# Altium PCB nrf-adafruit bno055.PcbDoc
Units mm, origin at the board's own origin, x right, y up, seen from the top; angles counter-clockwise.
Board outline 49.99 x 33.68 mm, 2 copper layers (Top Layer, Bottom Layer); 52 components, 41 nets, 215 pads, 48 vias.
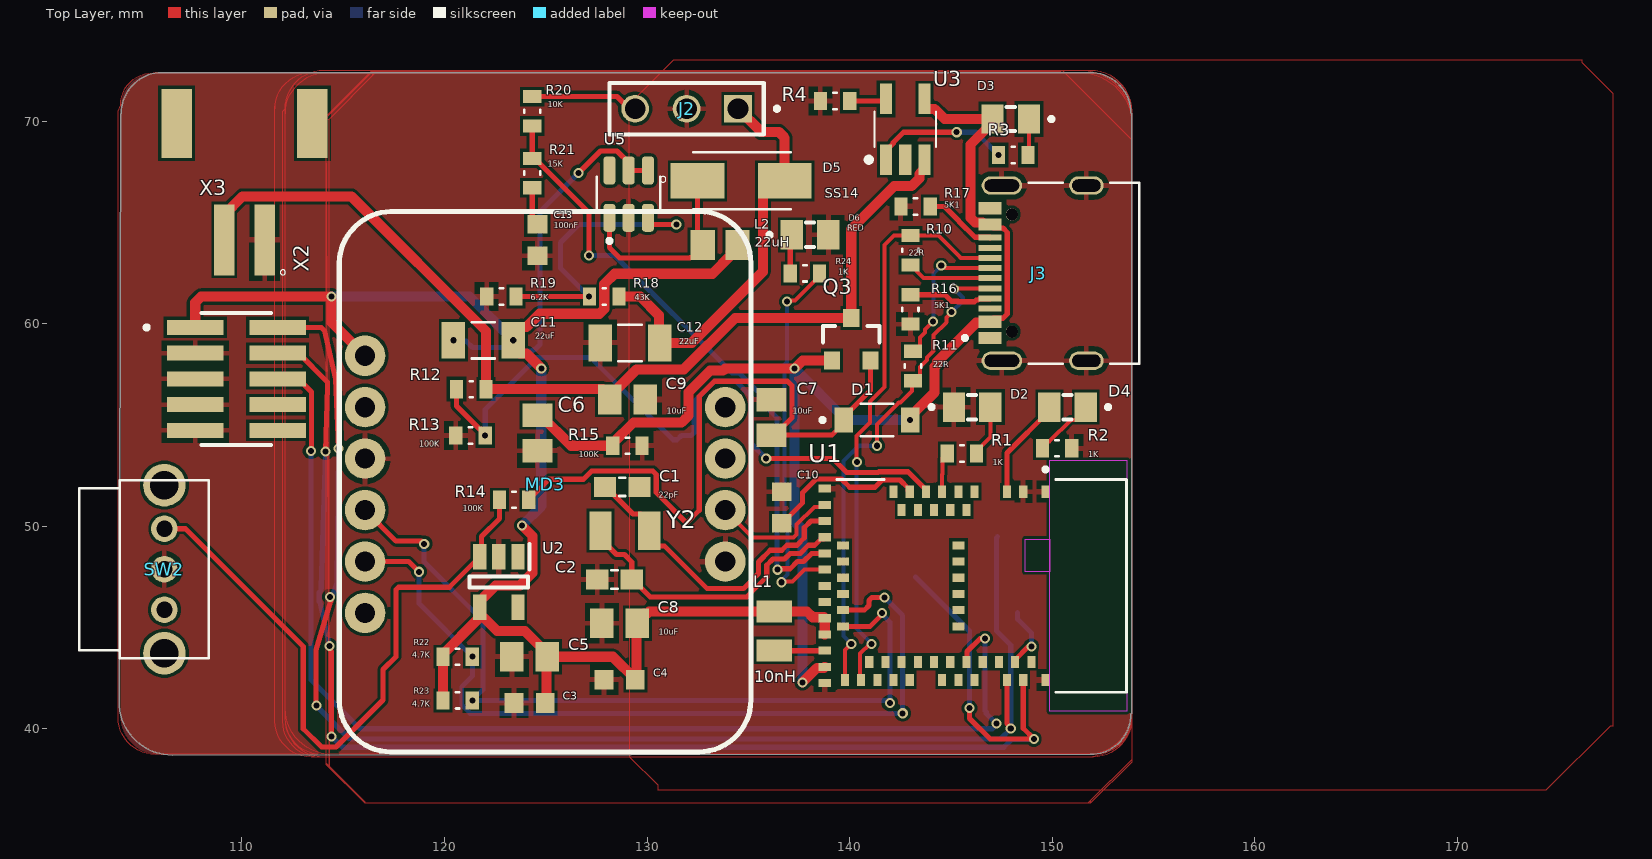
[diagram p0: Top Layer view]
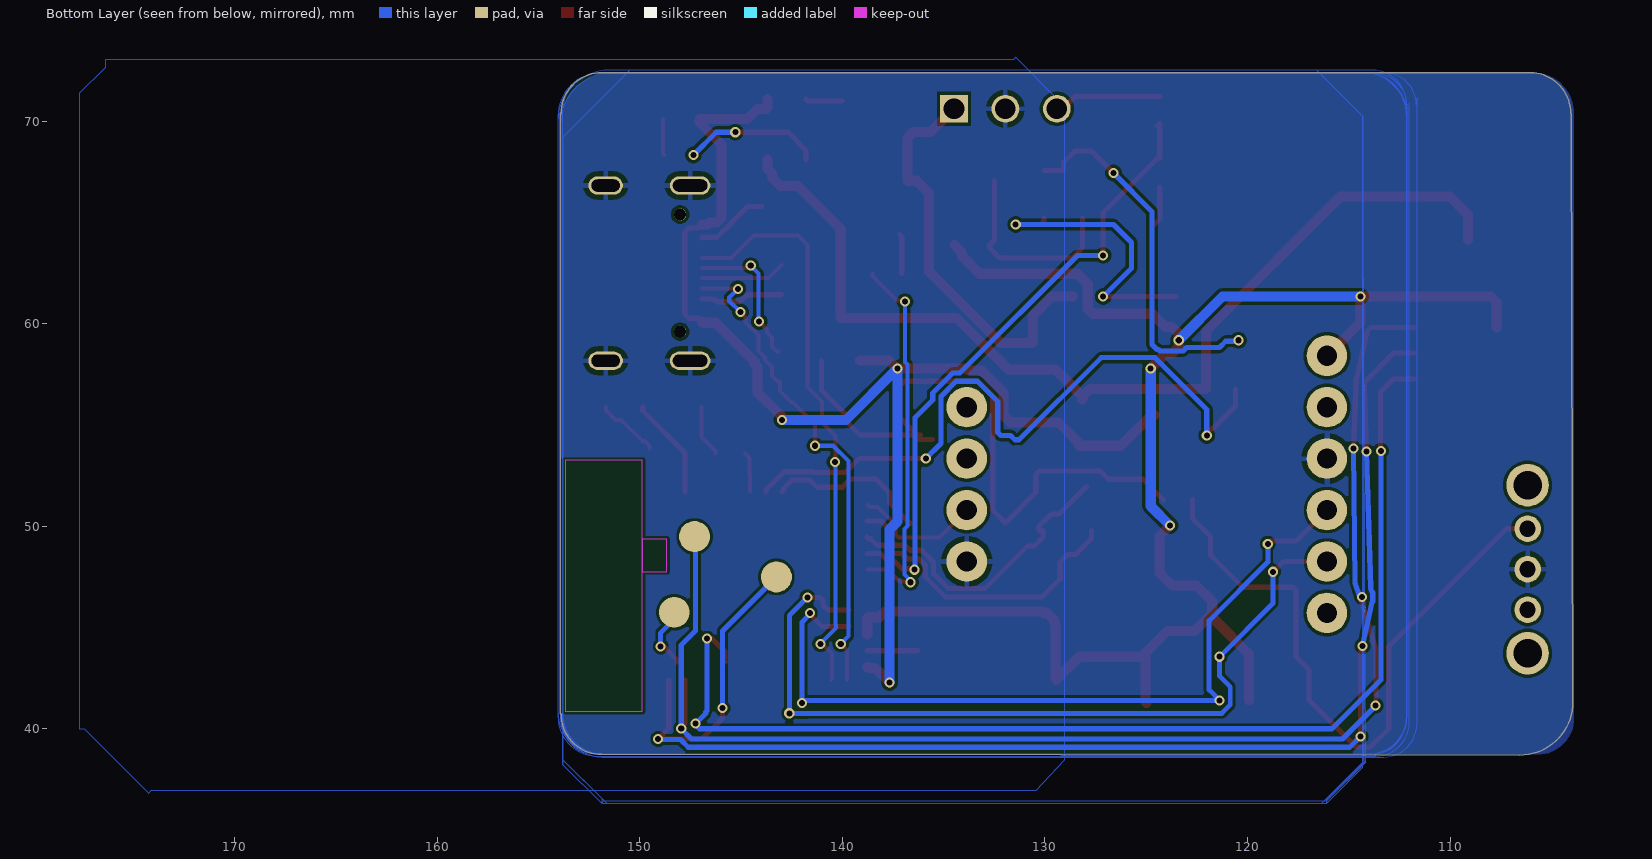
[diagram p1: Bottom Layer view, seen from below]
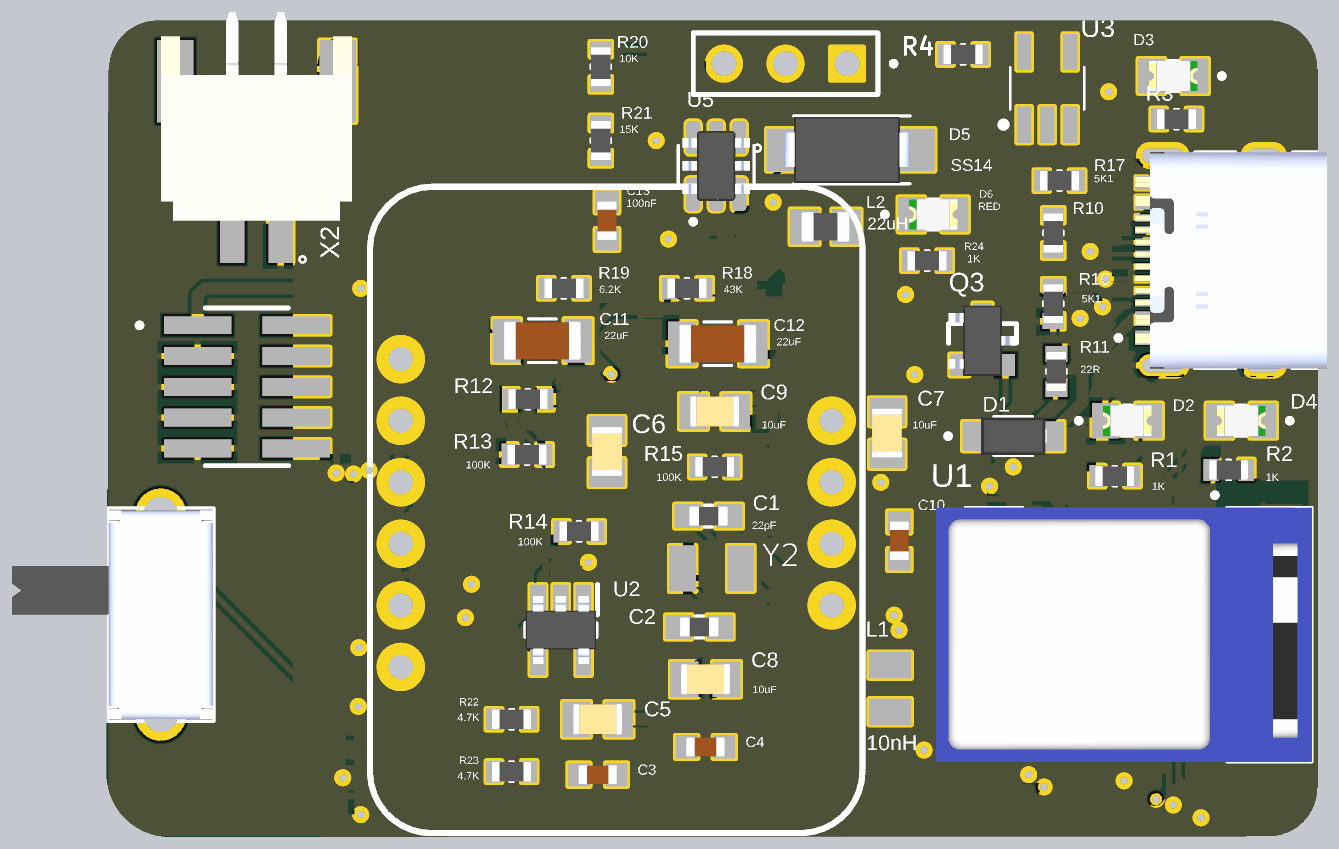
[diagram p2: 3D render of the assembled board from above, using the file's embedded part models]

## Layer stack, top to bottom
Top Solder: solder mask 0.0102, Solder Resist, Dk 3.5
Top Layer: signal copper 0.0356
Dielectric 1: dielectric 0.32, FR-4, Dk 4.8
Bottom Layer: signal copper 0.0356
Bottom Solder: solder mask 0.0102, Solder Resist, Dk 3.5

## Board outline
103.936,41.323 104.013,70.358 104.045,70.39 cw(c106.045,70.39) 106.045,72.39 151.892,72.39 cw(c151.892,70.39) 153.892,70.39 153.924,70.39 153.924,40.735 153.892,40.735 cw(c151.892,40.735) 151.892,38.735 106.552,38.707 cw(c106.552,41.323)

## Design rules (kind name [scope] priority, off if disabled: settings)
Clearance Clearance_1 [All] p1: gap=0.15 ignorepadtopadclearanceinfootprint=FALSE
PolygonConnect [All] p1: connectstyle=Relief reliefconductorwidth=0.254 reliefentries=4 polygonreliefangle="90 Angle" airgapwidth=0.254
RoutingVias [All] p1: holewidth=0.711 width=1.27 viastyle="Through Hole" minholewidth=0.711 minwidth=1.27 maxholewidth=0.711 maxwidth=1.27
SolderMaskExpansion [All] p1: expansion=0.102 istentingtop=FALSE
Width [All] p1: maxlimit=0.5 minlimit=0.2 preferedwidth=0.254 minimp=50.000000 maximp=50.000000 favimp=50.000000
30 further rules are at their usual default settings.

## Components (designator, comment, footprint, x,y, rotation, side; value= is the part's Value field where it differs from the comment)
C1 "22pF" CAPC1608X90 128.778,51.943 r0 top
C2 "22pF" CAPC1608X90 128.397,47.371 r180 top
C3 "0.1uF" CAPC1608X90N#1 124.206,41.275 r180 top
C4 "0.1uF" CAPC1608X90N#1 128.651,42.418 r180 top
C5 "10uF" CAPC2012X88N 124.206,43.561 r0 top
C6 "10uF" CAPC2012X88N 124.587,54.61 r90 top
C7 "10uF" CAPC2012X88N 136.144,55.372 r270 top
C8 "10uF" CAPC2012X88N 128.651,45.212 r0 top
C9 "10uF" CAPC2012X88N 129.032,56.261 r180 top
C10 "0.1uF" CAPC1608X90N#1 136.652,50.927 r90 top
C11 "22uF" CAPC3216X229N 121.92,59.182 r0 top
C12 "22uF" CAPC3216X229N 129.159,59.055 r0 top
C13 "100nF" CAPC1608X90N#2 124.587,64.135 r90 top
D1 "MBR0540" DIO_MBR0540-TP 141.351,55.245 r0 top
D2 "RED" LEDC2012X70N 146.05,55.88 r0 top
D3 "ORANGE" LEDC2012X70N 147.955,70.104 r180 top
D4 "BLUE" LEDC2012X70N 150.76,55.88 r180 top
D5 "SS14" SMA 134.493,67.056 r0 top
D6 "RED" LEDC2012X70N 138.049,64.389 r0 top
J2 "MTSW-103-13-G-S-570" SAMTEC_MTSW-103-13-G-S-570 131.953,70.612 r0 top
J3 "TYPE-C-31-M-12" HRO_TYPE-C-31-M-12 151.689,62.496 r90 top
L1 "10nH" INDC2015X152N 136.271,44.831 r270 top
L2 "22uH" INDC2012X145N 133.604,63.881 r180 top
MD3 "Module BNO055" PCBComponent_1 124.968,52.832 r270 top
Q3 "AO3401" SOT23-3 140.081,59.182 r0 top
R1 "1K" RES_ERJU03J5R6V 145.542,53.594 r0 top
R2 "1K" RES_ERJU03J5R6V 150.241,53.848 r0 top
R3 "1K" RES_ERJU03J5R6V 148.082,68.326 r180 top
R4 "4K7" RES_ERJU03J5R6V 139.282,70.993 r180 top
R10 "22R" RES_ERJU03J5R6V 143.002,63.627 r270 top
R11 "22R" RES_ERJU03J5R6V 143.129,57.912 r90 top
R12 "100K" RES_ERJU03J5R6V 121.322,56.769 r180 top
R13 "100K" RES_ERJU03J5R6V 121.285,54.483 r0 top
R14 "100K" RES_ERJU03J5R6V 123.436,51.312 r0 top
R15 "100K" RES_ERJU03J5R6V 129.032,53.975 r0 top
R16 "5K1" RES_ERJU03J5R6V 143.002,60.706 r90 top
R17 "5K1" RES_ERJU03J5R6V 143.256,65.786 r180 top
R18 "43K" RES_ERJU03J5R6V 127.889,61.341 r0 top
R19 "6.2K" RES_ERJU03J5R6V 122.809,61.341 r0 top
R20 "10K" RES_ERJU03J5R6V 124.333,70.485 r270 top
R21 "15K" RES_ERJU03J5R6V 124.333,67.437 r90 top
R22 "4.7K" RES_ERJU03J5R6V 120.65,43.561 r0 top
R23 "4.7K" RES_ERJU03J5R6V 120.65,41.402 r0 top
R24 "1K" RES_ERJU03J5R6V 137.795,62.484 r0 top
SW2 "SK12D07VG4" SK12D07VG4 106.172,47.879 r270 top
U1 "MDBT50Q-1MV2" XCVR_MDBT50Q-1MV2 145.921,47.057 r270 top
U2 "RT9080-33GJ5" SOT94P280X100-5N 122.682,47.244 r270 top
U3 "MCP73831T-2ACI/OT" SOT23-5 142.748,69.596 r90 top
U5 "MT3608" SOT95P280X145-6N 129.093,66.394 r90 top
X2 "FTSH-105-01-X-DV-P-K-X" SAMTEC_FTSH-105-01-X-DV-P-K-X 109.728,57.277 r270 top
X3 "S2B-PH-SM4-TB" JST_S2B-PH-SM4-TB 110.125,64.135 r0 top
Y2 "32.768 KHz" XTAL3215 128.905,49.784 r0 top

## Footprints (in the part's own frame and the unit in brackets; to place one, negate y for a bottom-side part, rotate by r counter-clockwise, add the part's x,y. Pads: shape width x height; smd on the part's side, far side on the other; paste and mask are expansions set on the pad)
CAPC1608X90 [mm]
  rect 1.1x1 smd: 1(-0.85,0) 2(0.85,0)
  silkscreen extent -0.15,-0.45 0.15,0.45, body extent -0.8,-0.4 0.8,0.4, height 0.9
CAPC1608X90N#1 [mm]
  rect 0.92x0.97 smd: 1(-0.775,0) 2(0.775,0)
  body extent -0.8,-0.4 0.8,0.4, height 0.95
CAPC1608X90N#2 [mm]
  rect 0.92x0.98 smd: 1(-0.775,0) 2(0.775,0)
  body extent -0.8,-0.41 0.8,0.41, height 0.9
CAPC2012X88N [mm]
  rect 1.16x1.47 smd: 1(-0.875,0) 2(0.875,0)
  body extent -1.02,-0.64 1.02,0.64, height 1.4
CAPC3216X229N [mm]
  rect 1.16x1.82 smd: 1(-1.475,0) 2(1.475,0)
  silkscreen extent -0.57,-0.9 0.57,0.9, body extent -1.6,-0.8 1.6,0.8, height 2.29
DIO_MBR0540-TP [mm]
  rect 0.91x1.22 smd: A(1.635,0) C(-1.635,0)
  silkscreen extent -2.79,-0.8 0.8,0.8, body extent -1.83,-0.77 1.83,0.77, height 0.8
HRO_TYPE-C-31-M-12 [mm]
  rect 0.6x1.14 smd mask+0.05: A1_B12(-3.2,4.75) A4_B9(-2.4,4.75) B1_A12(3.2,4.75) B4_A9(2.4,4.75)
  rect 0.3x1.14 smd mask+0.05: A5(-1.25,4.75) A6(-0.25,4.75) A7(0.25,4.75) A8(1.25,4.75) B5(1.75,4.75) B6(0.75,4.75) B7(-0.75,4.75) B8(-1.75,4.75)
  oval 0.9x2 hole 0.6 slot 1.7 at 90 deg: S1(-4.325,4.17) S2(4.325,4.17)
  oval 0.9x1.7 hole 0.6 slot 1.4 at 90 deg: S3(-4.325,0) S4(4.325,0)
  round 0.6 hole 0.6 unplated: ""(-2.89,3.68) ""(2.89,3.68)
  silkscreen extent -4.47,-2.6 4.47,6.1, body extent -4.47,-2.6 4.47,5.31, height 3.31
INDC2012X145N [mm]
  rect 1.2x1.47 smd: 1(-0.86,0) 2(0.86,0)
  body extent -1,-0.63 1,0.63, height 1.45
INDC2015X152N [mm]
  rect 1.09x1.75 smd: 1(-0.959,0) 2(0.959,0)
JST_S2B-PH-SM4-TB [mm]
  rect 1x3.5 smd: 1(1,0) 2(-1,0)
  rect 1.5x3.4 smd: P1(3.35,5.75) P2(-3.35,5.75)
  silkscreen extent 1.77,-1.73 2.03,-1.47, body extent -3.95,0 3.95,8.6, height 5.5
LEDC2012X70N [mm]
  rect 1.1x1.45 smd: A(0.9,0) C(-0.9,0)
  silkscreen extent -2.1,-0.6 0.2,0.6, body extent -1,-0.63 1,0.63, height 0.7
PCBComponent_1 [mm]
  round 2 hole 1 mask+0: 1(-5.588,-8.89) 2(-3.048,-8.89) 3(-0.508,-8.89) 4(2.032,-8.89) 5(4.572,-8.89) 6(7.112,-8.89) 7(-3.048,8.89) 8(-0.508,8.89) 9(2.032,8.89) 10(4.572,8.89)
  silkscreen extent -12.71,-10.16 13.97,10.16
RES_ERJU03J5R6V [mm]
  rect 0.65x0.9 smd paste+0 mask+0.102: 1(-0.725,0) 2(0.725,0)
  silkscreen extent -0.08,-0.4 0.08,0.4, body extent -0.8,-0.4 0.8,0.4, height 0.45
SAMTEC_FTSH-105-01-X-DV-P-K-X [mil]
  rect 29x110 smd paste+0 mask+4.02: 01(-100,-80) 02(-100,80) 03(-50,-80) 04(-50,80) 05(0,-80) 06(0,80) 07(50,-80) 08(50,80) 09(100,-80) 10(100,80)
  silkscreen extent -128,-178 128,68
SAMTEC_MTSW-103-13-G-S-570 [mm]
  rect 1.37x1.37 / inner round 1.37 / far side rect 1.37x1.37 hole 1.02 mask+0.102: 01(2.54,0)
  round 1.37 hole 1.02 mask+0.102: 02(0,0) 03(-2.54,0)
  silkscreen extent -3.81,-1.27 4.56,1.27
SK12D07VG4 [mm]
  round 1.308 hole 0.8: 1(-2,0) 2(2,0) COM(0,0)
  round 2.1 hole 1.4: M1(-4.15,0) M2(4.15,0)
  silkscreen extent -4.4,-4.2 4.4,2.2, body extent -4.3,-6.15 4.3,2.15, height 4.7
SMA [mm]
  rect 2.65x1.75 smd paste+0 mask+0.102: P1(-2,0) P2(2.3,0)
  silkscreen extent -3.84,-1.4 2.6,1.4, body extent -2.6,-1.36 2.6,1.36, height 2.5
SOT23-3 [mm]
  rect 0.8x0.9 smd: 1(-0.95,-1) 2(0.95,-1) 3(0,1.1)
  silkscreen extent -1.4,-0.1 1.4,0.7, body extent -1.4,-1.45 1.4,1.45, height 1.25
SOT23-5 [mm] "SOT23, 5-Leads, Body 3.0x3.0mm (max), Pitch 0.95mm, IPC Medium Density"
  rect 1.5x0.6 smd: 1(-1.5,0.95) 2(-1.5,0) 3(-1.5,-0.95) 4(1.5,-0.95) 5(1.5,0.95)
  silkscreen extent -1.62,-1.53 0.87,1.92, body extent -1.75,-1.52 1.75,1.53, height 1.45
SOT94P280X100-5N [mm]
  rect 1.25x0.65 smd paste+0 mask+0.102: 1(-1.25,0.94) 2(-1.25,0) 3(-1.25,-0.94) 4(1.25,-0.94) 5(1.25,0.94)
  silkscreen extent -1.87,-1.45 0.27,1.51, body extent -1.4,-1.45 1.4,1.45, height 1
SOT95P280X145-6N [mm]
  rrect50% 1.37x0.59 smd: 1(-1.17,0.95) 2(-1.17,0) 3(-1.17,-0.95) 4(1.17,-0.95) 5(1.17,0) 6(1.17,0.95)
  silkscreen extent -2.4,-1.57 0.85,1.56, body extent -1.45,-1.4 1.45,1.4, height 1.45
XCVR_MDBT50Q-1MV2 [mm]
  rect 0.6x0.4 smd: 1(-4.65,3.75) 2(-4.65,2.65) 3(-4.65,1.85) 4(-4.65,0.25) 5(-3.75,-0.15) 6(-4.65,-0.55) 7(-3.75,-0.95) 8(-4.65,-1.35) 9(-3.75,-1.75) 10(-4.65,-2.15) 11(-3.75,-2.55) 12(-4.65,-2.95) 13(-3.75,-3.35) 14(-4.65,-3.75) 34(4.65,-6.15) 35(4.65,-5.35) 36(3.75,-4.95) 37(4.65,-4.55) 38(3.75,-4.15) 39(4.65,-3.75) 40(3.75,-3.35) 41(4.65,-2.95) 42(3.75,-2.55) 43(3.75,-1.75) 44(4.65,-1.35) 45(3.75,-0.95) 46(4.65,-0.55) 47(3.75,-0.15) 48(4.65,0.25) 49(3.75,0.65) 50(3.75,1.45) 51(4.65,1.85) 52(3.75,2.25) 53(4.65,2.65) 54(3.75,3.05) 55(4.65,3.75)
  rect 0.4x0.6 smd: 15(-4.8,-7.15) 16(-4,-7.15) 17(-3.2,-7.15) 18(-2.4,-7.15) 19(-2,-6.25) 20(-1.6,-7.15) 21(-1.2,-6.25) 22(-0.8,-7.15) 23(-0.4,-6.25) 24(0,-7.15) 25(0.4,-6.25) 26(0.8,-7.15) 27(1.2,-6.25) 28(1.6,-7.15) 29(2,-6.25) 30(2.4,-7.15) 31(3.2,-7.15) 32(4,-7.15) 33(4.8,-7.15) 56(-2,-0.55) 57(-1.2,-0.55) 58(-0.4,-0.55) 59(0.4,-0.55) 60(1.2,-0.55) 61(2,-0.55)
  Keep-Out Layer region: -0.7,2.75 -2.3,2.75 -2.3,3.95 -0.7,3.95
  Keep-Out Layer region: 6.2,3.95 -6.2,3.95 -6.2,7.75 6.2,7.75
  Keep-Out Layer region: -0.7,2.75 -2.3,2.75 -2.3,3.95 -0.7,3.95
  Keep-Out Layer region: 6.2,3.95 -6.2,3.95 -6.2,7.75 6.2,7.75
  silkscreen extent -5.85,-6.55 5.25,7.75, body extent -5.25,-7.75 5.25,7.75, height 1.69
XTAL3215 [mm] "XTAL3215"
  rect 1.1x1.9 smd: P$1(1.2,0) P$2(-1.2,0)

## Part data
C1 C2: library part CC0603JPNPO9BN220, "22 pF Â±5% 50V Ceramic Capacitor C0G, NP0 0603 (1608 Metric)", Package="0603 Yageo", Check_prices=https://www.snapeda.com/parts/CC0603JPNPO9BN220/Yageo/view-part/?ref=eda, MF=Yageo, MP=CC0603JPNPO9BN220, SnapEDA_Link=https://www.snapeda.com/parts/CC0603JPNPO9BN220/Yageo/view-part/?ref=snap
C3 C4 C10: library part C0603C104K4RAC, "0.1 ÂµF Â±10% 16V Ceramic Capacitor X7R 0603 (1608 Metric)", Package="603-2 KEMET", Check_prices=https://www.snapeda.com/parts/C0603C104K4RAC/KEMET/view-part/?ref=eda, MF=KEMET, MP=C0603C104K4RAC, SnapEDA_Link=https://www.snapeda.com/parts/C0603C104K4RAC/KEMET/view-part/?ref=snap
C5 C6 C7 C8 C9: library part C0805C106K4PACTU, "10 ÂµF Â±10% 16V Ceramic Capacitor X5R 0805 (2012 Metric)", Package="0805 Kemet", Check_prices=https://www.snapeda.com/parts/C0805C106K4PACTU/KEMET/view-part/?ref=eda, MF=KEMET, MP=C0805C106K4PACTU, SnapEDA_Link=https://www.snapeda.com/parts/C0805C106K4PACTU/KEMET/view-part/?ref=snap
C11 C12: library part 12063D226MAT2A, "22 µF ±20% 25V Ceramic Capacitor X5R 1206 (3216 Metric)", Package=None, Check_prices=https://www.snapeda.com/parts/12063D226MAT2A/Kyocera/view-part/?ref=eda, MF=Kyocera, MP=12063D226MAT2A, SnapEDA_Link=https://www.snapeda.com/parts/12063D226MAT2A/Kyocera/view-part/?ref=snap
C13: library part 06035C104K4T2A, "Capacitor MLCC 0603 100nF 50V", Package="1608 AVX", Check_prices=https://www.snapeda.com/parts/06035C104K4T2A/AVX/view-part/?ref=eda, MF=AVX, MP=06035C104K4T2A, SnapEDA_Link=https://www.snapeda.com/parts/06035C104K4T2A/AVX/view-part/?ref=snap
D1: library part MBR0540-TP, "Diode Schottky 40 V 500mA Surface Mount SOD-123", Package="SOD-123 Multicomp", Check_prices=https://www.snapeda.com/parts/MBR0540-TP/Micro+Commercial+Components/view-part/?ref=eda, MF="Micro Commercial", MP=MBR0540-TP, SnapEDA_Link=https://www.snapeda.com/parts/MBR0540-TP/Micro+Commercial+Components/view-part/?ref=snap
D2 D3 D4 D6: library part 597-3305-607F, "LED Uni-Color Green 4-Pin Chip 0805 T/R", Package=None, Availability=Unavailable, MP=597-3305-607F, Price=None
D5: "Diode Schottky 40 V 1A Surface Mount DO-214AC (SMA)", Package="SMA-2 ON Semiconductor", Check_prices=https://www.snapeda.com/parts/SS14/Onsemi/view-part/?ref=eda, MF=ON, MP=SS14, SnapEDA_Link=https://www.snapeda.com/parts/SS14/Onsemi/view-part/?ref=snap
J2: "Connector Header Through Hole 3 position 0.100 (2.54mm)", Package=None, Check_prices=https://www.snapeda.com/parts/MTSW-103-13-G-S-570/Samtec/view-part/?ref=eda, MF=Samtec, MP=MTSW-103-13-G-S-570, SnapEDA_Link=https://www.snapeda.com/parts/MTSW-103-13-G-S-570/Samtec/view-part/?ref=snap
J3: "USB Connectors 24 Receptacle 1 8.94*7.3mm RoHS", Package=Package, Check_prices=https://www.snapeda.com/parts/TYPE-C-31-M-12/HRO+Electronics+Co.%252C+Ltd./view-part/?ref=eda, MF="HRO Electronics Co., Ltd.", MP=TYPE-C-31-M-12, SnapEDA_Link=https://www.snapeda.com/parts/TYPE-C-31-M-12/HRO+Electronics+Co.%252C+Ltd./view-part/?ref=snap
L1: library part LQW2BAS10NG00L, "FIXED IND 10NH 600MA 100 MOHM", Package=None, Availability=Unavailable, MP=LQW2BAS10NG00L, Price=None
L2: library part LQM21DH220M70L, "Inductor with Inductance: 22uH Tol. +/-20%, Package: 0805 (2012)", Package="2012 Bourns", Check_prices=https://www.snapeda.com/parts/LQM21DH220M70L/Murata/view-part/?ref=eda, MF=Murata, MP=LQM21DH220M70L, SnapEDA_Link=https://www.snapeda.com/parts/LQM21DH220M70L/Murata/view-part/?ref=snap
MD3: library part Component_1, "Module 9 DOF BNO055 by Adafruit"
Q3: "P-Channel 30 V 4A (Ta) 1.4W (Ta) Surface Mount SOT-23-3", Package="SOT-23-3 Alpha &amp; Omega Semiconductor", Check_prices=https://www.snapeda.com/parts/AO3401/Alpha/view-part/?ref=eda, MF="Alpha & Omega Semiconductor", MP=AO3401, SnapEDA_Link=https://www.snapeda.com/parts/AO3401/Alpha/view-part/?ref=snap
R1 R2 R3 R4 R10 R11 R12 R13 R14 R15 R16 R17 R18 R19 R20 R21 R22 R23 R24: library part ERJU03J5R6V, "0201 anti-sulfurated resistor 0603 Anti-Sulfurated", Package="1608-2 Panasonic", Check_prices=https://www.snapeda.com/parts/ERJ-U03J5R6V/Panasonic/view-part/?ref=eda, MF=Panasonic, MP=ERJ-U03J5R6V, SnapEDA_Link=https://www.snapeda.com/parts/ERJ-U03J5R6V/Panasonic/view-part/?ref=snap
SW2: "Switch Slide ON ON SPDT Side Slide 0.3A 30VDC PC Pins Bracket Mount/Through Hole Bulk", Package=None, Check_prices=https://www.snapeda.com/parts/SK12D07VG4/C%2526K/view-part/?ref=eda, MF=C&K, MP=SK12D07VG4, SnapEDA_Link=https://www.snapeda.com/parts/SK12D07VG4/C%2526K/view-part/?ref=snap
U1: "802.15.4, Bluetooth Bluetooth v5.4, ZigbeeÂ® Transceiver Module 2.36GHz ~ 2.5GHz Integrated, Chip Surface Mount", Package="SMD-61 Raytac Corporation", Check_prices=https://www.snapeda.com/parts/MDBT50Q-1MV2/Raytac+Corporation/view-part/?ref=eda, MF="Raytac Corporation", MP=MDBT50Q-1MV2, SnapEDA_Link=https://www.snapeda.com/parts/MDBT50Q-1MV2/Raytac+Corporation/view-part/?ref=snap
U2: "Linear Voltage Regulator IC Positive Fixed 1 Output 600mA TSOT-23-5", Package="TSOT-23 Richtek", Check_prices=https://www.snapeda.com/parts/RT9080-33GJ5/Richtek/view-part/?ref=eda, MF="Richtek USA", MP=RT9080-33GJ5, SnapEDA_Link=https://www.snapeda.com/parts/RT9080-33GJ5/Richtek/view-part/?ref=snap
U3: library part MCP73831/2, "MCP73831/2 LIPO Charger    VDD: 3.75 - 6V  Temp -40 - 85Â°C  Programmable Charge Rate: 15-500mA       NOTE: STAT is a tri-state logic output on the MCP73831 and an open-drain output on the MCP73832.   SOT23-5 with 4.2V output and tri-state logic on STAT = MCP73831T-2ACI/OT", JLC_ROTATION=0, LCSC=C424093, Temp=Temp:, 3.75-6V=3.75-6V, -40-85Â°C=-40-85Â°C, DeviceSetName=MCP73831/2, GateName_1=G$1, LibraryName=microbuilder, LIPOCharger="LIPO Charger", MCP73831/2=MCP73831/2, SymbolName_1=MCP73831/2, VDD=VDD:
U5: "High Efficiency 1.2MHz2A Step Up Converter", Package=Package, Availability="Not in stock", Check_prices=https://www.snapeda.com/parts/MT3608/Aerosemi+Technology+Co.%252C+Ltd/view-part/?ref=eda, MF="Aerosemi Technology Co., Ltd", MP=MT3608, Price=None, SnapEDA_Link=https://www.snapeda.com/parts/MT3608/Aerosemi+Technology+Co.%252C+Ltd/view-part/?ref=snap
X2: Package=None, Availability=Unavailable, MF="{'manufacturer': u'Samtec Inc.'}", MP=FTSH-105-01-X-DV-P-K-X, Price=None
X3: "Connector Header Surface Mount, Right Angle 2 position 0.079 (2.00mm)", Package=None, Check_prices=https://www.snapeda.com/parts/S2B-PH-SM4-TB/JST/view-part/?ref=eda, MF="JST Sales", MP=S2B-PH-SM4-TB, SnapEDA_Link=https://www.snapeda.com/parts/S2B-PH-SM4-TB/JST/view-part/?ref=snap
Y2: library part XTAL-3.2X1.5, "Low cost SMT crystals, no capacitors included    http://www.ladyada.net/library/eagle", DeviceName=-3.2X1.5, DeviceSetName=XTAL, GateName_1=G$1, LibraryName=adafruit2, SymbolName_1=XTAL

## Free pads (board coordinates)
  round 1.524 smd far side: "TP NCF1"(148.298,45.755) "TP SWCLK"(143.256,47.498) "TP SWDIO"(147.3,49.492)

## Via types
v1: diameter 0.5, hole 0.3, Top Layer to Bottom Layer, 48 vias

## Nets (pads, with @x,y where several pads share a name; then routed paths per layer and width w, separated by ;. In a path a pad name is that pad's centre, name@x,y a point inside that pad or via, vN(x,y) a via of type N, cw(c..) or ccw(c..) an arc to the next point about the centre after c; other vN are vias at no path point)
3.3V: C3.1 C4.1 C5.2 C8.2 C11.2 L1.1 L2.1 MD3.1 R22.1 R23.1 U1.28 U1.30 U2.4 X2.01 | length 81.8
  Top Layer w0.5: X2.01 107.696,61.048 107.989,61.341 v1(114.427,61.341) 114.427,60.071 MD3.1 ; R23.1 R22.1 119.925,43.686 U2.4@121.667,45.428 ; v1(123.825,50.038) 124.347,49.516 124.347,47.703 123.72,47.076 122.524,47.076 121.742,46.294 U2.4 121.742,45.694 122.604,44.833 123.964,44.833 125.081,43.716 C5.2 ; v1(124.781,57.796) 124.055,58.522 123.725,58.522 123.395,58.852 123.395,59.512 123.725,59.842 124.055,59.842 124.704,60.491 127.655,60.491 127.889,60.725 127.889,61.957 128.401,62.469 133.232,62.469 134.114,63.35 134.114,63.531 L2.1 ; C3.1 125.031,41.325 125.031,43.511 C5.2 ; U1.30 U1.28 138.721,45.507 138.179,45.507 137.896,45.79 L1.1 130.104,45.79 130.011,45.697 129.856,45.697 129.526,45.367 C8.2 129.476,45.162 129.476,42.468 C4.1 129.426,42.443 128.308,43.561 C5.2
  Bottom Layer w0.5: v1(114.427,61.341) 121.236,61.341 v1(123.395,59.182) ; v1(123.825,50.038) 124.781,50.994 v1(124.781,57.796)
5V: C12.2 D5.P2 J2.01 R18.2 | length 20.5
  Top Layer w0.5: R18.2 129.667,61.341 130.586,60.422 130.586,59.103 C12.2 132.207,59.055 135.718,62.566 135.718,66.431 136.343,67.056 D5.P2 136.793,69.176 136.5,69.469 135.636,69.469 J2.01
AREF: C10.1 U1.12 | length 8.1
  Top Layer w0.254: C10.1 136.677,50.152 137.683,51.158 137.683,51.661 138.356,52.334 139.599,52.334 140.009,51.924 141.252,51.924 141.612,52.284 142.494,52.284 142.898,51.88 142.898,51.78 U1.12
D10: MD3.9 U1.16 | length 6.4
  Top Layer w0.2: MD3.9 135.216,49.442 137.241,49.442 137.387,49.588 137.387,50.083 138.261,50.957 138.671,50.957 U1.16
EN: R14.1 SW2.1 U2.3 | length 32.3
  Top Layer w0.254: SW2.1 107.22,49.879 113.03,44.069 113.03,40.005 113.938,39.097 114.645,39.097 116.967,41.419 116.967,42.926 117.602,43.561 117.602,46.863 117.729,46.99 120.238,46.99 U2.3 121.835,48.587 121.835,49.5 122.711,50.376 R14.1
GND: C1.2 C2.2 C3.2 C4.2 C5.1 C6.1 C7.1 C8.1 C9.1 C10.2 C12.1 C13.1 D2.C D6.A J2.02 J3.A1_B12 J3.B1_A12 J3.S1 J3.S2 J3.S3 J3.S4 MD3.3 MD3.10 R2.2 R4.2 R13.1 R15.2 R16.1 R17.2 R19.1 SW2.COM U1.1 U1.2 U1.15 U1.33 U1.55 U2.2 U3.2 U5.2 X2.03 X2.05 X2.07 X2.09 X3.1
"Led 1": R1.1 U1.8 | length 2
  Top Layer w0.2: U1.8 144.571,52.565 144.592,52.586 144.592,53.369 R1.1
"Led 2": D4.A U1.3 | length 5
  Top Layer w0.254: U1.3 147.771,53.616 149.86,55.705 D4.A
NetC1_1: C1.1 U1.17 Y2.P$1 | length 15.6
  Top Layer w0.254: C1.1 127.978,51.943 129.314,50.607 129.682,50.607 130.302,49.987 130.302,49.784 Y2.P$1 130.105,49.442 130.528,49.019 130.87,49.019 132.969,46.92 134.757,46.92 135.507,47.67 135.507,48.241 136.079,48.814 136.651,48.814 136.902,49.065 137.397,49.065 137.764,49.432 137.764,49.927 138.094,50.257 U1.17
NetC2_1: C2.1 U1.18 Y2.P$2 | length 14.7
  Top Layer w0.254: Y2.P$2 127.705,49.384 128.488,48.602 128.888,48.602 129.247,48.242 C2.1 129.297,47.371 130.152,46.516 134.924,46.516 135.911,47.502 135.911,48.074 136.219,48.382 136.791,48.382 137.069,48.661 137.564,48.661 137.964,49.061 138.275,49.061 138.598,49.384 138.698,49.384 U1.18
NetC7_2: C7.2 D1.C Q3.2 R14.2 | length 32.4
  Top Layer w0.254: R14.2 125.173,52.324 126.867,52.324 127.263,52.72 130.293,52.72 130.455,52.558 130.455,51.663 131.953,50.165 132.581,50.793 132.581,56.409 133.329,57.157 136.941,57.157 137.156,56.942 137.156,55.354 136.299,54.497 C7.2 ; C7.2@135.558,54.278 136.306,54.278 136.335,54.307 C7.2@136.525,54.497 ; C7.2@136.624,54.497 139.123,54.497 139.716,55.09 D1.C 139.716,55.4 141.031,56.715 Q3.2
NetC11_1: C11.1 U5.4 U5.5 | length 18.4
  Top Layer w0.254: v1(126.619,67.437) 127.708,68.526 128.521,68.526 129.093,67.954 U5.5 U5.4
  Bottom Layer w0.254: v1(120.445,59.182) 120.49,59.137 121.076,59.137 121.39,58.823 123.009,58.823 123.177,58.655 124.323,58.655 124.395,58.727 124.47,58.727 124.714,58.972 124.714,65.532 v1(126.619,67.437)
NetC13_2: C13.2 R21.1 | length 1.9
  Top Layer w0.254: R21.1 124.333,65.164 C13.2
NetD2_A: D2.A R1.2 | length 2.6
  Top Layer w0.2: R1.2 146.267,53.719 146.95,54.402 D2.A
NetD3_C: D3.C R3.1 | length 1.8
  Top Layer w0.2: R3.1 148.855,68.374 D3.C
NetD4_C: D4.C R2.1 | length 3.2
  Top Layer w0.2: R2.1 149.516,53.973 149.741,54.198 149.866,54.198 150.923,55.255 151.21,55.255 151.66,55.705 D4.C
NetD5_P1: D5.P1 L2.2 U5.1 | length 9.9
  Top Layer w0.254: U5.1 128.143,63.754 128.651,63.246 132.109,63.246 132.136,63.273 132.271,63.273 132.744,63.746 L2.2 132.493,64.132 D5.P1
NetD6_C: D6.C R24.1 | length 1.9
  Top Layer w0.254: R24.1 137.07,64.31 D6.C
NetJ2_03: J2.03 R20.1 | length 5.3
  Top Layer w0.254: R20.1 128.513,71.21 129.111,70.612 J2.03
NetJ3_A5: J3.A5 R16.2 | length 4.1
  Top Layer w0.254: R16.2 144.707,61.431 145.032,61.106 145.337,61.106 145.356,61.087 146.168,61.087 146.254,61.173 146.347,61.173 146.397,61.223 146.916,61.223 J3.A5
NetJ3_A6: J3.A6 R10.2 | length 4.2
  Top Layer w0.2: R10.2 143.658,62.246 J3.A6
NetJ3_A7: J3.A7 R11.2 | length 7.3
  Top Layer w0.2: R11.2 143.254,58.637 143.479,58.862 143.479,59.329 143.723,59.574 143.723,59.715 144.109,60.101 v1(144.109,60.107) ; v1(144.526,62.865) 144.607,62.865 144.726,62.746 J3.A7
  Bottom Layer w0.2: v1(144.109,60.107) 144.145,60.143 144.145,62.468 144.526,62.849 v1(144.526,62.865)
NetJ3_B5: J3.B5 R17.1 | length 3.6
  Top Layer w0.254: R17.1 144.687,65.786 145.405,65.068 145.405,65.049 146.185,64.269 146.916,64.269 J3.B5
NetL1_1: 
NetL1_2: L1.2 U1.31 | length 2.5
  Top Layer w0.254: L1.2 136.286,43.857 U1.31
NetR3_2: R3.2 U3.1 | length 6.9
  Top Layer w0.254: U3.1 141.798,68.546 142.154,68.902 142.154,68.943 142.664,69.454 v1(145.288,69.454)
  Bottom Layer w0.254: v1(145.288,69.454) 146.229,69.454 v1(147.357,68.326)
NetR4_1: R4.1 U3.5 | length 1.8
  Top Layer w0.254: R4.1 141.695,70.993 U3.5
NetR18_1: R18.1 R19.2 U5.3 | length 14.6
  Top Layer w0.254: R19.2 R18.1 ; U5.3 130.043,65.063 130.209,64.897 v1(131.445,64.897)
  Bottom Layer w0.254: v1(127.127,61.341) 125.73,62.738 125.73,64.008 126.619,64.897 v1(131.445,64.897)
NetR24_2: R24.2 U1.22 | length 18.7
  Top Layer w0.2: v1(136.637,47.237) 136.671,47.271 137.187,47.271 137.773,47.857 U1.22 ; v1(136.906,61.087) 136.963,61.144 137.305,61.144 138.52,62.359 R24.2
  Bottom Layer w0.2: v1(136.637,47.237) 136.637,47.318 136.938,47.619 136.938,49.871 136.787,50.021 136.787,57.992 136.906,58.111 v1(136.906,61.087)
NFC1: "pad.TP NCF1" U1.52 | length 3.1
  Top Layer w0.245: U1.52 148.171,43.407 148.833,44.069 v1(148.971,44.069)
  Bottom Layer w0.245: 148.298,45.755 148.298,45.408 148.971,44.736 v1(148.971,44.069)
P0.04: R20.2 R21.2 U1.20 | length 31
  Top Layer w0.254: v1(127.127,63.373) 127.127,65.493 124.458,68.162 R21.2 R20.2 ; v1(136.438,47.855) 136.485,47.903 137.065,47.903 137.42,48.257 137.731,48.257 138.131,48.657 U1.20 ; R20.2 124.458,69.76 124.333,69.885 R20.2
  Bottom Layer w0.254: v1(127.127,63.373) 128.397,63.373 134.209,57.561 134.554,57.561 135.539,56.576 135.539,56.231 136.41,55.36 136.41,47.883 v1(136.438,47.855)
SCL: MD3.5 R22.2 U1.27 | length 41.3
  Top Layer w0.245: MD3.5 118.237,48.26 v1(118.745,47.752) ; U1.27 140.726,45.857 140.956,46.087 140.956,46.338 141.099,46.482 v1(141.732,46.482)
  Bottom Layer w0.245: v1(118.745,47.752) 118.745,46.191 v1(121.375,43.561) 121.375,42.6 120.853,42.078 120.853,41.186 121.271,40.767 141.755,40.767 141.77,40.752 142.202,40.752 142.217,40.767 v1(142.621,40.767) 142.621,45.593 v1(141.732,46.482)
SDA: MD3.4 R23.2 U1.29 | length 40.3
  Top Layer w0.245: MD3.4 117.602,49.276 118.855,49.276 v1(118.999,49.132) ; U1.29 141.014,45.057 141.412,45.455 141.412,45.458 141.605,45.651 v1(141.605,45.72)
  Bottom Layer w0.245: v1(118.999,49.132) 118.999,48.237 121.898,45.338 121.898,41.925 v1(121.375,41.402) 141.79,41.402 141.917,41.275 v1(141.986,41.275) 141.986,45.27 141.605,45.651 v1(141.605,45.72)
SWCLK: "pad.TP SWCLK" U1.53 X2.04 | length 70.6
  Top Layer w0.254: X2.04 112.789,58.547 114.187,57.148 114.228,57.108 114.228,56.897 v1(114.135,53.682) ; v1(114.323,44.092) 114.37,44.045 114.37,43.877 114.427,43.821 v1(114.427,39.624) ; v1(145.923,41.021) 145.923,40.513 146.939,39.497 v1(149.098,39.497) 148.571,40.024 U1.53
  Bottom Layer w0.254: v1(114.135,53.682) 113.915,46.926 cw(c113.661,46.934) 113.841,46.755 113.819,46.733 113.819,46.296 113.859,46.256 v1(114.323,44.092) ; v1(114.427,39.624) 114.958,39.093 147.614,39.093 147.999,39.478 149.079,39.478 v1(149.098,39.497) ; 143.256,47.498 145.923,44.831 v1(145.923,41.021)
SWDIO: "pad.TP SWDIO" U1.51 X2.02 | length 68.7
  Top Layer w0.254: X2.02 113.919,59.817 114.068,59.668 114.632,57.275 v1(114.767,53.832) ; v1(113.684,41.148) 113.665,41.167 113.665,43.887 114.383,46.292 ccw(c114.14,46.366) 114.384,46.294 114.394,46.329 114.394,46.366 114.394,46.466 v1(114.346,46.515) ; U1.51 147.771,40.256 147.955,40.072 v1(147.955,40.024)
  Bottom Layer w0.254: v1(113.684,41.148) 113.684,41.129 115.316,39.497 147.447,39.497 147.955,40.005 147.955,44.141 147.259,44.836 147.259,49.452 147.3,49.492 ; v1(114.346,46.515) 114.378,46.482 114.441,46.482 114.688,47.2 v1(114.767,53.832)
SWO: U1.47 X2.06 | length 57.3
  Top Layer w0.254: X2.06 112.789,57.277 113.434,56.632 113.434,53.744 v1(113.411,53.721) ; U1.47 145.796,43.332 145.796,43.815 146.431,44.45 v1(146.685,44.45)
  Bottom Layer w0.254: v1(113.411,53.721) 113.411,42.418 113.792,42.037 115.824,40.005 147.048,40.005 v1@147.302,40.259 ; v1(146.685,44.45) 146.685,40.894 146.746,40.833 146.746,40.757 v1(147.244,40.259)
USB-DM: J3.B7 R11.1 U1.34 | length 24.5
  Top Layer w0.2: U1.34 139.771,43.886 v1(140.081,44.196) ; v1(141.351,53.975) 141.351,55.029 142.427,56.105 142.506,56.105 143.081,56.679 143.081,57.139 143.206,57.139 143.479,57.412 143.479,57.858 143.829,58.208 143.829,58.329 144.145,58.645 144.145,59.436 144.78,60.071 144.78,60.312 144.952,60.484 v1@144.952,60.497 ; v1(145.161,61.722) 145.173,61.734 146.927,61.734 J3.B7
  Bottom Layer w0.2: v1(140.081,44.196) 139.7,44.577 139.7,53.213 140.462,53.975 v1(141.351,53.975) ; v1(145.034,60.579) 145.586,61.131 145.586,61.297 v1(145.161,61.722)
USB-DP: J3.B6 R10.1 U1.35 | length 28.6
  Top Layer w0.2: v1(140.371,53.177) 140.335,53.213 140.335,54.445 141.001,55.111 141.001,56.152 141.732,56.883 141.732,63.881 142.203,64.352 R10.1 144.382,64.352 145.489,63.246 J3.B6 ; U1.35 140.521,42.457 140.521,43.711 141.006,44.196 v1(141.083,44.196)
  Bottom Layer w0.2: v1(140.371,53.177) 140.335,53.141 140.335,45.157 140.318,45.14 140.318,44.975 141.083,44.21 v1(141.083,44.196)
VBAT: C9.2 Q3.3 R12.1 U3.3 X3.2 | length 49.9
  Top Layer w0.5: X3.2 109.125,65.385 110.025,66.285 115.398,66.285 122.047,59.636 R12.1 127.804,56.769 C9.2@128.157,56.416 ; C9.2 C9.2@128.157,56.416 ; U3.3 143.698,67.646 143.448,67.396 143.448,67.18 143.059,66.791 142.195,66.791 140.081,64.677 Q3.3 134.353,60.282 131.816,57.745 129.486,57.745 C9.2@128.157,56.416
VBUS: C6.2 D1.A D3.A J3.A4_B9 J3.B4_A9 Q3.1 R15.1 U1.32 U3.4 | length 64.9
  Top Layer w0.254: J3.A4_B9 147.112,60.269 147.574,60.269 147.786,60.481 147.786,64.511 147.574,64.723 147.112,64.723 J3.B4_A9
  Top Layer w0.5: C6.2 124.742,55.485 126.252,53.975 R15.1 128.307,54.1 129.333,55.126 130.653,55.126 131.707,55.126 132.054,55.473 132.054,56.627 133.111,57.684 133.757,57.684 133.858,57.785 v1(137.287,57.785) 137.684,58.182 Q3.1 ; v1(137.668,42.291) 138.384,43.007 138.721,43.007 U1.32 ; v1(142.986,55.245) 142.986,55.4 144.2,56.614 144.2,57.872 144.329,58.001 144.329,58.122 146.253,60.046 146.889,60.046 J3.A4_B9 ; U3.4 143.698,70.646 143.748,70.596 144.198,70.596 144.69,70.104 D3.A 147.055,69.929 145.969,68.843 145.969,65.23 146.203,64.996 146.569,64.996 146.669,64.896 J3.B4_A9
  Bottom Layer w0.5: v1(137.668,42.291) 137.668,49.848 137.287,50.229 v1(137.287,57.785) 139.827,55.245 v1(142.986,55.245)
VDIV: R12.2 R13.2 U1.10 | length 34.5
  Top Layer w0.254: R12.2 120.597,55.938 121.729,54.806 121.812,54.806 122.01,54.608 v1(122.01,54.483) ; v1(135.883,53.34) 139.165,53.34 139.855,52.65 141.407,52.65 141.445,52.688 142.89,52.688 143.771,51.807 U1.10
  Bottom Layer w0.254: v1(122.01,54.483) 122.01,55.771 124.562,58.323 127.224,58.323 131.276,54.271 131.487,54.271 131.699,54.483 132.185,54.483 132.334,54.632 132.334,56.162 133.329,57.157 134.387,57.157 135.135,56.409 135.135,54.088 v1(135.883,53.34)
pads on no net: J3. J3.A8 J3.B8 MD3.2 MD3.6 MD3.7 MD3.8 SW2.2 SW2.M1 SW2.M2 U1.4 U1.5 U1.6 U1.7 U1.9 U1.11 U1.13 U1.14 U1.19 U1.21 U1.23 U1.24 U1.25 U1.26 U1.36 U1.37 U1.38 U1.39 U1.40 U1.41 U1.42 U1.43 U1.44 U1.45 U1.46 U1.48 U1.49 U1.50 U1.54 U1.56 U1.57 U1.58 U1.59 U1.60 U1.61 U2.1 U2.5 U5.6 X2.08 X2.10 X3.P1 X3.P2

## Polygon pours and split planes (outlines as drawn)
GND on Bottom Layer "GND_L02_P040" (solid, remove dead copper, pour order 40): 103.886,70.358 cw(c105.918,70.358) 105.918,72.39 151.384,72.39 cw(c151.384,69.85) 153.924,69.85 153.924,40.513 cw(c152.146,40.513) 152.146,38.735 105.664,38.735 cw(c105.664,40.513) 103.886,40.513 103.886,69.977
GND on Bottom Layer "NONET_L02_P036" (solid, remove dead copper, shelved, pour order 36): 111.665,70.8 cw(c113.255,70.8) 113.255,72.39 151.384,72.39 cw(c151.384,69.85) 153.924,69.85 153.924,40.64 cw(c151.892,40.64) 151.892,38.608 113.284,38.608 cw(c113.284,40.259) 111.633,40.259 111.633,71.12
GND on Bottom Layer "NONET_L02_P034" (solid, remove dead copper, shelved, pour order 34): 112.141,70.8 cw(c113.858,70.8) 113.858,72.517 151.511,72.517 cw(c151.511,69.977) 154.051,69.977 154.051,40.64 cw(c152.056,40.64) 152.056,38.645 113.702,38.645 cw(c113.702,40.333) 112.014,40.333 112.014,70.866
GND on Bottom Layer "NONET_L02_P031" (solid, remove dead copper, shelved, pour order 31): 112.141,70.358 cw(c114.173,70.358) 114.173,72.39 151.384,72.39 cw(c151.384,69.85) 153.924,69.85 153.924,40.767 cw(c151.892,40.767) 151.892,38.735 114.046,38.735 cw(c114.046,40.64) 112.141,40.64 112.141,70.231
GND on Bottom Layer "NONET_L02_P029" (solid, remove dead copper, shelved, pour order 29): 112.141,40.64 ccw(c114.046,40.64) 114.046,38.735 151.765,38.735 ccw(c151.765,40.767) 153.797,40.767 153.797,70.485 ccw(c151.892,70.485) 151.892,72.39 113.792,72.39 ccw(c113.792,70.739) 112.141,70.739
GND on Bottom Layer "NONET_L02_P025" (solid, remove dead copper, shelved, pour order 25): 113.919,38.735 cw(c113.919,40.513) 112.141,40.513 112.141,70.231 cw(c114.3,70.231) 114.3,72.39 151.892,72.39 cw(c151.892,70.231) 154.051,70.231 154.051,40.894 cw(c151.765,40.894) 151.765,38.608 113.792,38.608 cw(c113.792,38.735) 113.665,38.735
GND on Bottom Layer "NONET_L02_P008" (solid, remove dead copper, shelved, pour order 8): 114.3,70.231 116.586,72.517 150.495,72.517 153.797,69.215 153.797,38.481 151.638,36.322 116.078,36.322 114.3,38.1
GND on Bottom Layer "NONET_L02_P005" (solid, remove dead copper, shelved, pour order 5): 153.797,69.215 150.622,72.39 116.459,72.39 114.3,70.231 114.3,38.481 114.173,38.354 116.078,36.449 116.078,36.417 151.797,36.417 151.892,36.322 153.797,38.227
GND on Bottom Layer "NONET_L02_P004" (solid, remove dead copper, shelved, pour order 4): 114.3,70.231 116.459,72.39 150.622,72.39 153.797,69.215 153.797,38.227 151.892,36.322 116.078,36.322 116.078,36.512 114.236,38.354
GND on Bottom Layer "NONET_L02_P002" (solid, remove dead copper, shelved, pour order 2): 114.3,70.231 116.459,72.39 150.622,72.39 153.797,69.215 153.797,38.481 151.892,36.576 151.892,36.322 116.332,36.322 114.3,38.354 114.173,38.354
GND on Bottom Layer "NONET_L02_P000" (solid, remove dead copper, shelved, pour order 0): 129.032,38.481 129.032,70.993 129.286,70.993 131.445,73.152 131.572,73.025 176.403,73.025 176.403,72.644 177.673,71.374 177.673,40.005 177.419,40.005 174.244,36.83 174.117,36.957 130.429,36.957
no net on Top Layer "NONET_L01_P039" (solid, remove dead copper, pour order 39): 104.013,70.787 cw(c105.616,70.787) 105.616,72.39 151.384,72.39 cw(c151.384,69.85) 153.924,69.85 153.924,40.567 cw(c152.092,40.567) 152.092,38.735 105.73,38.735 cw(c105.73,40.579) 103.886,40.579 103.886,70.485
GND on Top Layer "GND_L01_P038" (solid, remove dead copper, pour order 38): 104.013,70.612 cw(c105.791,70.612) 105.791,72.39 152.019,72.39 cw(c152.019,70.485) 153.924,70.485 153.924,40.767 cw(c151.892,40.767) 151.892,38.735 105.918,38.735 cw(c105.918,40.64) 104.013,40.64
GND on Top Layer "NONET_L01_P035" (solid, remove dead copper, shelved, pour order 35): 111.633,70.612 cw(c113.411,70.612) 113.411,72.39 151.384,72.39 cw(c151.384,69.85) 153.924,69.85 153.924,40.513 cw(c152.019,40.513) 152.019,38.608 113.411,38.608 cw(c113.411,40.386) 111.633,40.386 111.633,70.739
GND on Top Layer "NONET_L01_P033" (solid, remove dead copper, shelved, pour order 33): 112.141,70.612 cw(c114.046,70.612) 114.046,72.517 151.384,72.517 cw(c151.384,69.977) 153.924,69.977 153.924,40.767 cw(c151.765,40.767) 151.765,38.608 113.792,38.608 cw(c113.792,40.386) 112.014,40.386 112.014,70.485
GND on Top Layer "NONET_L01_P032" (solid, remove dead copper, shelved, pour order 32): 112.141,70.358 cw(c114.173,70.358) 114.173,72.39 151.384,72.39 cw(c151.384,69.85) 153.924,69.85 153.924,40.513 cw(c152.019,40.513) 152.019,38.608 114.046,38.608 cw(c114.046,40.513) 112.141,40.513 112.141,70.104
GND on Top Layer "NONET_L01_P030" (solid, remove dead copper, shelved, pour order 30): 112.141,70.612 cw(c114.046,70.612) 114.046,72.517 151.892,72.517 cw(c151.892,70.485) 153.924,70.485 153.924,40.64 cw(c152.019,40.64) 152.019,38.735 113.919,38.735 cw(c113.919,40.513) 112.141,40.513 112.141,41.148
GND on Top Layer "NONET_L01_P024" (solid, remove dead copper, shelved, pour order 24): 112.141,70.358 cw(c114.173,70.358) 114.173,72.39 151.892,72.39 cw(c151.892,70.358) 153.924,70.358 153.924,40.894 cw(c151.765,40.894) 151.765,38.735 114.427,38.735 cw(c114.427,41.021) 112.141,41.021 112.141,70.866
GND on Top Layer "NONET_L01_P011" (solid, remove dead copper, shelved, pour order 11): 114.173,70.231 116.395,72.453 150.431,72.453 150.495,72.517 153.924,69.088 153.924,38.481 151.892,36.449 151.892,36.322 116.078,36.322 114.332,38.068 114.332,38.1
GND on Top Layer "NONET_L01_P009" (solid, remove dead copper, shelved, pour order 9): 114.3,70.104 116.459,72.263 116.459,72.517 150.495,72.517 153.924,69.088 153.924,38.481 151.765,36.322 116.11,36.322 114.332,38.1 114.3,38.1
GND on Top Layer "NONET_L01_P007" (solid, remove dead copper, shelved, pour order 7): 114.173,70.104 114.3,70.104 116.586,72.39 150.622,72.39 153.924,69.088 153.924,38.354 151.892,36.322 116.078,36.322 116.078,36.386 114.173,38.291
no net on Top Layer "NONET_L01_P006" (solid, remove dead copper, shelved, pour order 6): 114.173,70.168 116.459,72.453 116.459,72.517 150.495,72.517 153.924,69.088 153.924,38.354 151.892,36.322 116.078,36.322 114.173,38.227 114.173,38.354
no net on Top Layer "NONET_L01_P003" (solid, remove dead copper, shelved, pour order 3): 114.173,70.104 114.173,70.231 116.459,72.517 116.586,72.39 150.622,72.39 153.924,69.088 153.924,38.481 151.765,36.322 116.078,36.322 114.3,38.1
GND on Top Layer "NONET_L01_P001" (solid, remove dead copper, shelved, pour order 1): 129.11,71.026 129.319,71.026 131.318,73.025 176.149,73.025 176.149,72.898 177.673,71.374 177.673,40.132 177.546,40.132 174.371,36.957 130.556,36.957 130.556,37.211 129.159,38.608

## Silkscreen, mask and mechanical layers (free items; w line width, h text height)
Mechanical 1:
  lines w0.254: 104.013,70.358 103.936,41.323 ccw(c106.552,41.323) 106.552,38.707 151.892,38.735 ccw(c151.892,40.735) 153.892,40.735 ; 104.045,70.39 cw(c106.045,70.39) 106.045,72.39 151.892,72.39 cw(c151.892,70.39) 153.892,70.39 ; 153.924,40.735 153.924,70.39

## Text inside footprints (layer, text, board x,y; h text height)
J3: Mechanical 13 "PCB EDGE" at 153.589,67.696 h0.61 r90